# EAGLE board accelerometer_MM48453Q (EAGLE 6.2)
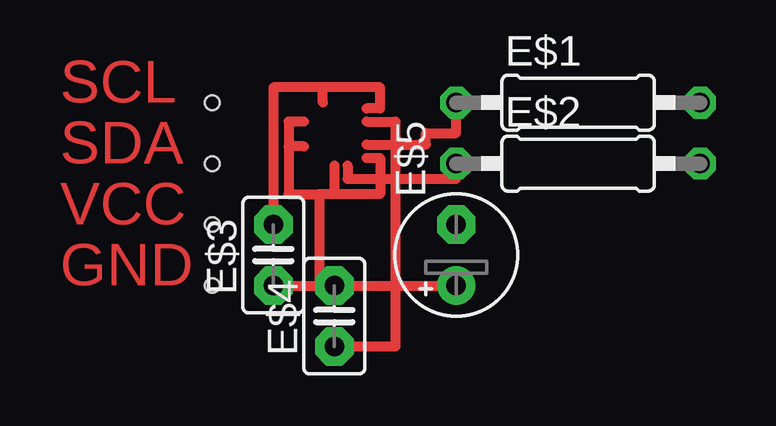
[diagram p0: board, top side]
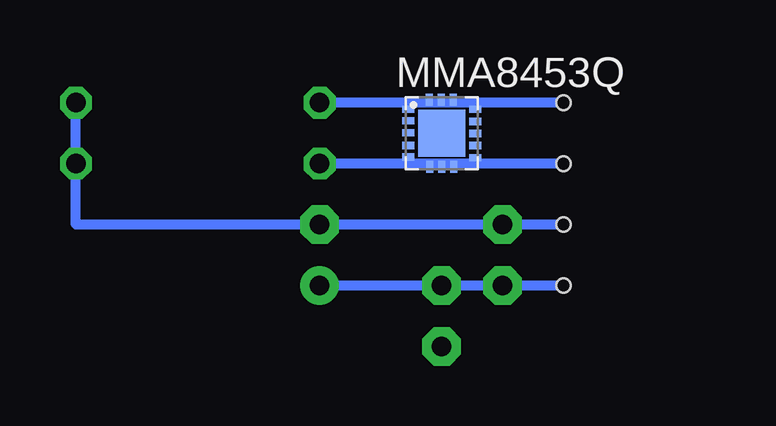
[diagram p1: board, bottom side, seen from below]

No outline drawn. Coordinates in mm, seen from the top.
Copper layers (1*16): Top 0.035mm / dielectric 1.5mm / Bottom 0.035mm
Design rules: minimum track width 10mil, minimum drill 24mil, track to track 8mil, track to pad 8mil, pad to pad 8mil, via to via 8mil, smd to smd 8mil, copper to edge 40mil, drill to drill 8mil, minimum pad ring 10mil, minimum via ring 8mil, stop-mask expansion 4mil, vias tented up to drill 0mil, thermal gap 10mil
Holes 0.6 mm at 0,3.81 0,6.35 0,8.89 0,11.43

## Footprints (pad centres in the part's own frame; a part is rotated, then mirrored left to right if it is on the bottom)
0207/10 = drill 0.813 octagon: 1 -5.08,0; 2 5.08,0
C2.5-2 = drill 0.813 pad 1.6 octagon: 1 -1.27,0; 2 1.27,0
E2,5-5 = drill 0.813 pad 1.6: + -1.27,0 | drill 0.813 pad 1.6 octagon: - 1.27,0
QFN16 = smd 0.5 x 0.3: 1 -1.4,0.512; 2 -1.4,0.012; 3 1.4,-1.02; 4 -1.4,-0.512; 5 1.4,0.996; 9 1.4,-0.512; 10 1.4,-0.012; 11 1.4,0.488; 12 -1.4,0.996; 13 -1.4,-0.996 | smd 0.3 x 0.5: 6 -0.488,-1.4; 7 0.012,-1.4; 8 0.512,-1.4; 14 0.488,1.4; 15 -0.012,1.4; 16 -0.512,1.4 | smd 1.95 x 1.95: EXP 0,0

## Placement (x,y rotation side)
E$1  4.7k  [0207/10]  15.24,11.43 0 top
E$2  4.7k  [0207/10]  15.24,8.89 0 top
E$3  0.1u  [C2.5-2]  2.54,5.08 90 top
E$4  0.1u  [C2.5-2]  5.08,2.54 90 top
E$5  4.7u  [E2,5-5]  10.16,5.08 90 top
MMA8453Q  [QFN16]  5.08,10.16 0 bottom

## Library data of the parts
E$1 E$2 = resistor
E$3 E$4 = capacitor-wima
E$5 = rcl
MMA8453Q = frazz

## Nets
S$3: E$1.2
S$4: E$3.1 E$5.+
S$5: E$2.1
S$6: E$1.1
S$7: E$3.2
S$10: E$4.1

## Tracks (layer width: path | path; a pad name or v marks a point on that pad's centre or on a via)
S$3
  Bottom 0.406: 0,6.35 20.32,6.35 E$1.2
S$4
  Top 0.406: E$3.1 E$5.+
  Bottom 0.406: 0,3.81 E$5.+
S$5
  Top 0.406: 5.64,8.81 5.64,8.26 10.16,8.26 E$2.1
  Bottom 0.406: 0,8.89 E$2.1
S$6
  Top 0.406: 6.43,9.68 8.89,9.68 8.89,10.16 10.16,10.16 E$1.1
  Bottom 0.406: 0,11.43 E$1.1
S$7
  Top 0.406: 4.6,12.06 6.99,12.06 6.99,11.19 6.43,11.19 | 4.6,12.06 2.54,12.06 E$3.2 | 4.6,11.43 4.6,12.06
S$9
  Top 0.406: 6.43,9.13 6.99,9.13 6.99,7.62 5.08,7.62 | 3.81,10.64 3.17,10.64 3.17,9.6 | 3.17,9.6 3.17,7.62 4.45,7.62 | 4.45,7.62 4.45,3.81 | 3.81,9.6 3.17,9.6 | 5.08,7.62 4.45,7.62 | 5.08,8.81 5.08,7.62
S$10
  Top 0.406: 6.43,10.64 7.62,10.64 7.62,1.27 E$4.1

## Text on the board
Top: SCL | SDA | VCC | GND